# Altium PCB PCB3.PcbDoc (part 2 of 2)
Units mil, origin at the board's own origin, x right, y up, seen from the top; angles counter-clockwise.
Board outline 6000 x 4000 mil, 2 copper layers (Top Layer, Bottom Layer); 107 components, 78 nets, 393 pads, 135 vias.
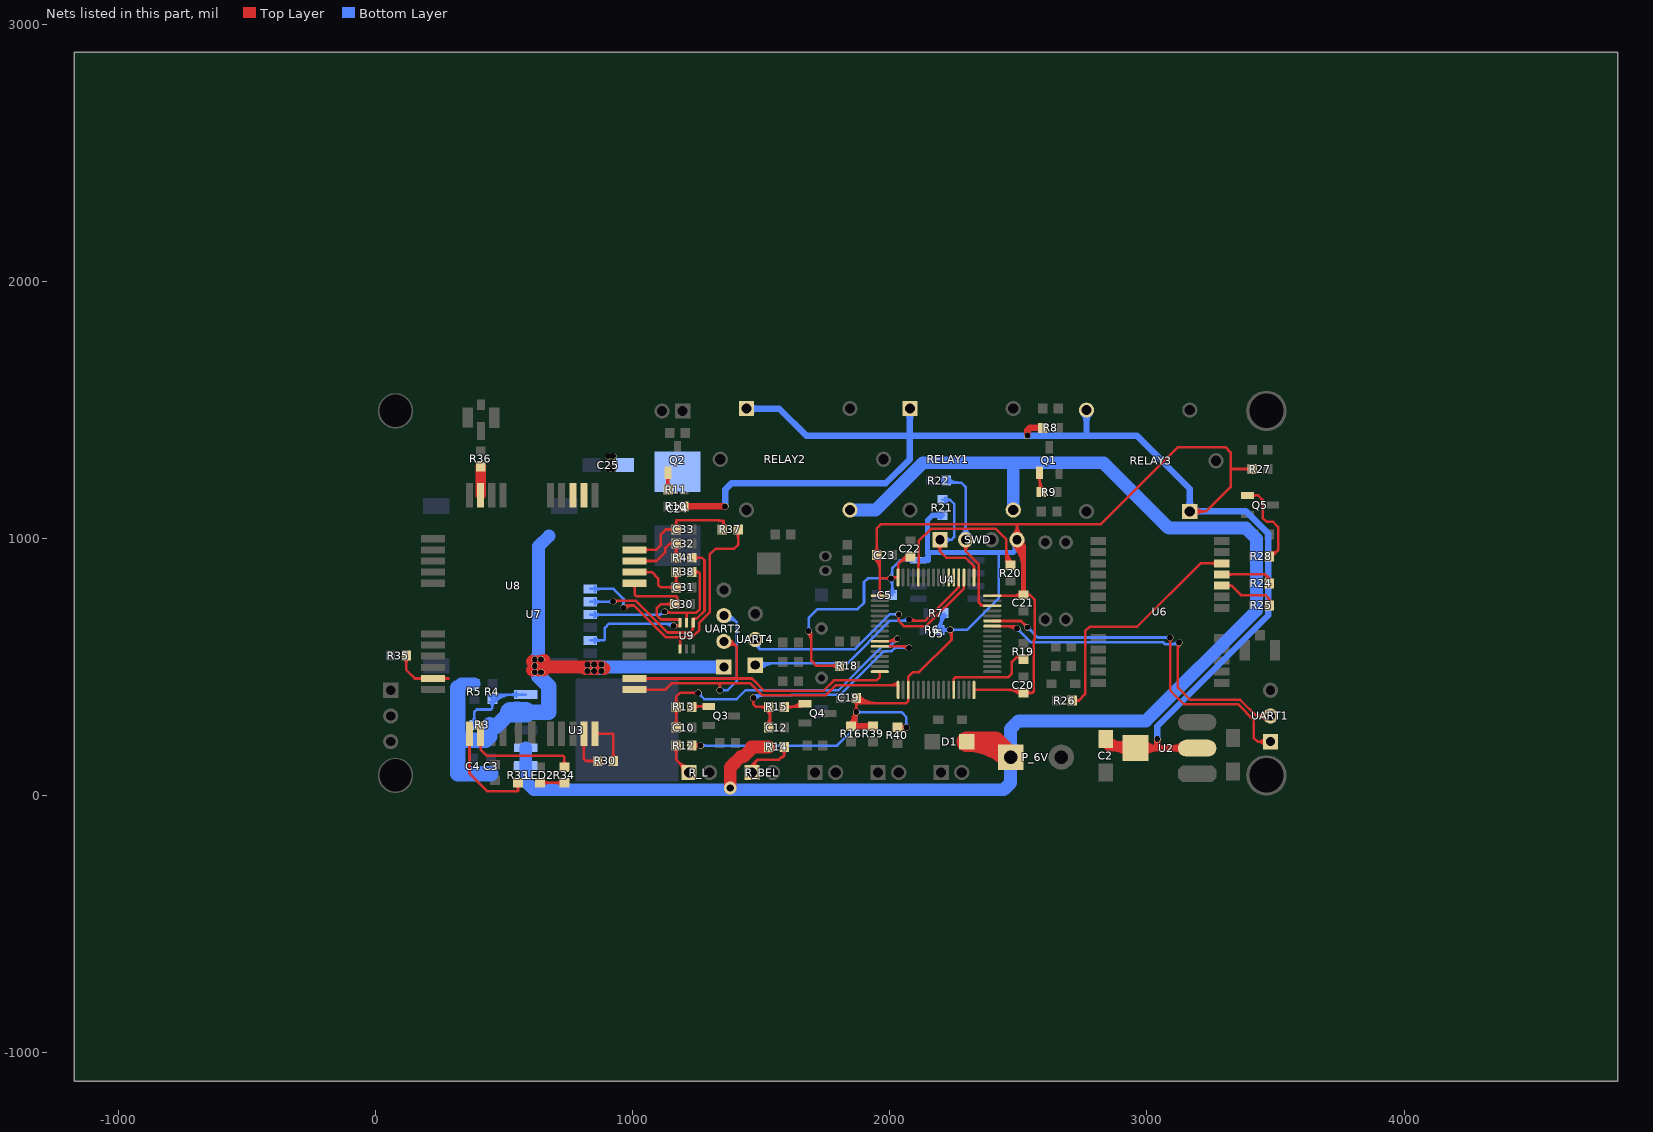
[diagram p2: the nets of this part, all layers, seen from the top]

## Via types
v1: diameter 25, hole 23, Top Layer to Bottom Layer, 134 vias
v2: diameter 50, hole 28, Top Layer to Bottom Layer, 1 vias

## Nets (pads, with @x,y where several pads share a name; then routed paths per layer and width w, separated by ;. In a path a pad name is that pad's centre, name@x,y a point inside that pad or via, vN(x,y) a via of type N, cw(c..) or ccw(c..) an arc to the next point about the centre after c; other vN are vias at no path point) (continued)
NetLED2_A: LED2.A R34.1 | length 210.6
  Top Layer w10: LED2.A@640,49.68 R34.1@735,49.69 R34.1@720.31,49.69 ; LED2.A@650.39,40.28 cw(c673.11,17.56) 673.11,49.68 cw(c673.11,81.81) LED2.A@650.39,59.09 ; R34.1@724.61,40.28 ccw(c701.89,17.56) 701.89,49.68 ccw(c701.89,81.81) R34.1@724.61,59.09
NetQ1_1: Q1.1 R9.2 | length 171.5
  Top Layer w10: Q1.1@2576.39,1238.75 cw(c2561.4,1223.76) 2582.6,1223.76 cw(c2603.79,1223.76) Q1.1@2588.81,1238.75 ; R9.2@2582.6,1187.09 Q1.1@2582.6,1255.79 ; 2582.6,1206.08 ccw(c2614.78,1206.08) R9.2@2592.02,1183.32 ; 2582.6,1230.22 ccw(c2638.92,1230.22) R9.2@2599.09,1190.39
NetQ2_1: Q2.1 R11.2 | length 189.7
  Top Layer w10: R11.2@1130.28,1200.39 ccw(c1118.87,1211.8) 1135,1211.8 ; Q2.1@1131.39,1238.75 cw(c1122.68,1230.04) 1135,1230.04 ; R11.2@1135,1185 Q2.1@1135,1250.79 ; 1135,1210.28 ccw(c1158.98,1210.28) R11.2@1142.02,1193.32 ; 1135,1217.49 cw(c1165.07,1217.49) Q2.1@1143.81,1238.75 ; Q2.1@1135,1234.42 ccw(c1183.12,1234.42) R11.2@1149.09,1200.39 ; 1139.1,1219.12 cw(c1159.52,1224.6) Q2.1@1144.03,1238.99
NetQ3_1: Q3.1 R13.2 | length 150.2
  Top Layer w10: R13.2@1230.32,345 1232.72,347.4 Q3.1@1295.79,347.4 ; R13.2@1239.72,336.57 cw(c1265.86,310.44) 1265.86,347.4 ; R13.2@1239.72,355.39 ccw(c1259.02,374.69) 1259.02,347.4 ; Q3.1@1278.75,341.19 ccw(c1263.76,326.21) 1263.76,347.4 ccw(c1263.76,368.6) Q3.1@1278.75,353.61
NetQ4_1: Q4.1 R15.2 | length 194.4
  Top Layer w10: R15.2@1595.31,345 Q4.1@1658.39,345 ; R15.2@1599.72,335.59 cw(c1622.44,312.87) 1622.44,345 cw(c1622.44,377.13) R15.2@1599.72,354.41 ; 1608.83,345 ccw(c1608.83,408.54) Q4.1@1653.75,363.61 ; 1632.97,345 ccw(c1632.97,384.39) Q4.1@1660.82,356.54
NetQ5_1: Q5.1 R28.2 | length 450
  Top Layer w10: Q5.1@3390.79,1167.4 3432.6,1167.4 3450,1150 3450,1080 3465,1065 3490,1065 3510,1045 3510,955 ; Q5.1@3407.82,1161.19 cw(c3422.81,1146.21) 3422.81,1167.4 cw(c3422.81,1188.6) Q5.1@3407.82,1173.61 ; R28.2@3460.32,935 3490,935 3510,955 ; R28.2@3475.8,934.26 ccw(c3479.22,957.62) 3495.92,940.92 ; R28.2@3477.25,944.15 ccw(c3482.83,982.17) 3510,955
NetR3_1: R3.1 R4.2 U3.5 | length 639.4
  Bottom Layer w10: R3.1@375.28,285.39 ccw(c352.56,308.11) 384.69,308.11 ccw(c416.81,308.11) R3.1@394.09,285.39 ; R3.1@384.69,275 384.69,324.69 395,335 450,335 455,340 R4.2@455,374.68 455,393 U3.5@585,393 ; R4.2@444.18,386.49 cw(c459.9,370.77) 459.9,393 ; R4.2@445.59,365.28 cw(c422.87,342.56) 455,342.56 cw(c487.13,342.56) R4.2@464.41,365.28 ; R4.2@451.25,379.42 cw(c484.04,346.63) 484.04,393 ; R4.2@458.32,372.35 cw(c508.18,322.48) 508.18,393 ; R4.2@465.39,365.28 cw(c532.33,298.34) 532.33,393 ; U3.5@548.51,384.51 ccw(c528.03,364.03) 528.03,393 ccw(c528.03,421.97) U3.5@548.51,401.49
NetR12_1: R12.1 R_L.1 | length 324.4
  Top Layer w10: R12.1@1160.28,184.61 cw(c1137.56,161.89) 1169.69,161.89 cw(c1201.81,161.89) R12.1@1179.09,184.61 ; R12.1@1169.69,195 1169.69,140.31 R_L.1@1220,90 ; R_L.1@1195.47,90 ccw(c1136.26,90) 1178.13,131.87 ccw(c1220,173.74) R_L.1@1220,114.53 ; R_L.1@1205.47,90 ccw(c1170.4,90) 1195.2,114.8 ccw(c1220,139.6) R_L.1@1220,104.53
NetR14_1: R14.1 R_BEL.1 | length 380.1
  Top Layer w10: R_BEL.1@1460.13,114.04 ccw(c1458.92,120) 1465,120 ; R_BEL.1@1465,90 1465,120 ; R_BEL.1@1468.44,92.94 cw(c1486.25,108.14) 1469.7,124.7 ; R_BEL.1@1469.87,114.04 cw(c1471.08,120) 1465,120 ; R_BEL.1@1476.05,99.43 cw(c1494.51,115.19) 1477.35,132.35 ; R_BEL.1@1483.66,105.92 cw(c1502.76,122.23) 1485,140 ; R14.1@1580.91,179.61 cw(c1558.19,156.89) 1590.31,156.89 cw(c1622.44,156.89) R14.1@1599.72,179.61 ; R14.1@1590.31,190 1590.31,155.84 1585,150.53 1580.07,150.53 1569.54,140 1485,140 ; 1465,120 1485,140
NetR19_2: R19.2 U5.28 | length 402.3
  Top Layer w10: U5.28@2248.9,411.5 2248.9,453.9 2255,460 2460,460 2475,475 2475,520 2494.68,539.68 ; R19.2@2505.72,529.11 ccw(c2494.69,528.64) 2494.69,539.68 ; R19.2@2530,539.68 2494.68,539.68
NetR20_1: R20.1 U5.60 | length 808.9
  Top Layer w10: U5.60@2111.1,848.5 2111.1,896.1 2112.29,897.29 2112.29,989.73 2160.09,1037.53 2412.62,1037.53 2452.47,997.67 2452.47,917.21 ; 2452.47,919.1 ccw(c2492.8,919.1) R20.1@2464.28,890.58 ; 2452.47,943.24 ccw(c2516.94,943.24) R20.1@2471.35,897.65 ; 2452.47,967.38 ccw(c2541.08,967.38) R20.1@2478.43,904.72 ; 2455.44,914.25 ccw(c2469.02,927.82) R20.1@2469.02,908.62 ; R20.1@2456.46,899.72 ccw(c2440.56,905.3) 2452.47,917.21 ; R20.1@2469.69,900 2452.47,917.21
NetR24_1: R24.1 U6.21 | length 322.8
  Top Layer w10: U6.21@3290.31,860.08 3459.92,860.08 ; U6.21@3312.17,852.48 cw(c3330.52,834.13) 3330.52,860.08 cw(c3330.52,886.03) U6.21@3312.17,867.68 ; R24.1@3463.71,832.5 ccw(c3443.63,843.79) 3459.92,860.08 ; 3469.25,850.75 cw(c3455.58,837.08) R24.1@3472.43,827.6 ; R24.1@3470.95,838.56 ccw(c3468.83,844.68) 3475.31,844.68 ; R24.1@3475.31,825 3475.31,844.69 ; R24.1@3479.68,838.56 cw(c3481.8,844.68) 3475.31,844.68 ; 3459.92,860.08 3475.31,844.69
NetR25_1: R25.1 U6.20 | length 296.1
  Top Layer w10: U6.20@3290.31,816.77 3328.23,816.77 ; U6.20@3312.66,809.7 cw(c3328.23,796.1) 3328.23,816.77 ; U6.20@3312.66,823.84 ccw(c3328.23,837.44) 3328.23,816.77 ; R25.1@3468.39,752.35 ccw(c3460.86,764.68) 3475.31,764.68 ; R25.1@3475.31,740 3475.31,764.69 ; R25.1@3482.24,752.35 cw(c3489.77,764.68) 3475.31,764.68 ; 3328.23,816.77 3365,780 3460,780 3475.31,764.69
NetR26_1: R26.1 U6.22 | length 1017.1
  Top Layer w10: R26.1@2710.31,370 2735,370 ; R26.1@2721.43,362.69 cw(c2735,353.76) 2735,370 ; R26.1@2721.43,377.31 ccw(c2735,386.24) 2735,370 ; U6.22@3268.46,895.79 ccw(c3250.11,877.44) 3250.11,903.39 ccw(c3250.11,929.33) U6.22@3268.46,910.99 ; U6.22@3290.31,903.39 3208.39,903.39 2962.27,657.27 2777.73,657.27 2760,639.54 2760,395 2735,370
NetR30_1: R30.1 U7.19 | length 238.2
  Top Layer w10: U7.19@805.05,201.51 cw(c790.06,186.52) 811.26,186.52 cw(c832.46,186.52) U7.19@817.47,201.51 ; U7.19@811.26,241.18 811.26,143.74 820,135 R30.1@864.69,135 ; R30.1@855.28,125.59 ccw(c832.56,102.87) 832.56,135 ccw(c832.56,167.13) R30.1@855.28,144.41
NetR30_2: R30.2 U7.20 | length 259.8
  Top Layer w10: U7.20@854.57,241.18 923.82,241.18 925.32,239.68 R30.2@925.32,135 ; U7.20@860.77,234.97 cw(c875.76,219.99) 875.76,241.18 cw(c875.76,262.38) U7.20@860.77,247.39 ; R30.2@915.91,145.39 ccw(c893.19,168.11) 925.32,168.11 ccw(c957.44,168.11) R30.2@934.72,145.39
NetR33_2: R33.2 U7.12 | length 480
  Top Layer w10: U7.12@360.17,201.51 cw(c345.18,186.52) 366.38,186.52 cw(c387.57,186.52) U7.12@372.59,201.51 ; U7.12@366.38,241.18 366.38,86.62 435,18 553,18 555,20 ; R33.2@546.15,39.75 cw(c528.55,20) 555,20 ; R33.2@555,49.68 555,20 ; R33.2@563.85,39.75 ccw(c581.45,20) 555,20
NetR34_2: R34.2 U7.13 | length 522.2
  Top Layer w10: U7.13@403.48,201.51 cw(c388.49,186.52) 409.68,186.52 cw(c430.88,186.52) U7.13@415.89,201.51 ; U7.13@409.68,241.18 409.68,180.32 435,155 730,155 735,150 R34.2@735,110.32 ; R34.2@725.59,119.72 ccw(c702.87,142.44) 735,142.44 ccw(c767.13,142.44) R34.2@744.41,119.72
NetR35_1: R35.1 U7.10 | length 350.8
  Top Layer w10: R35.1@110.91,534.61 cw(c88.19,511.89) 120.31,511.89 cw(c152.44,511.89) R35.1@129.72,534.61 ; R35.1@120.31,545 120.31,489.69 154.25,455.75 U7.10@224.65,455.75 284.65,455.75 ; U7.10@184.97,449.54 ccw(c169.99,434.55) 169.99,455.75 ccw(c169.99,476.94) U7.10@184.97,461.96 ; U7.10@264.32,449.54 cw(c279.31,434.55) 279.31,455.75 cw(c279.31,476.94) U7.10@264.32,461.96
NetR36_1: R36.1 U7.39 | length 110.7
  Top Layer w40: U7.39@410,1168.66 R36.1@410,1279.37
RING_BELL: C12.2 R15.1 U5.11 | length 1303.9
  Top Layer w10: v1@1464.7,374.7 cw(c1451.89,361.89) 1470,361.89 cw(c1488.11,361.89) v1@1475.3,374.7 ; v1(1470,380) 1470,355 1480,345 1534.68,345 C12.2@1534.68,265 ; C12.2@1520.28,275.39 ccw(c1485.49,310.18) 1534.68,310.18 ; R15.1@1520.28,334.61 cw(c1485.49,299.82) 1534.68,299.82 ; R15.1@1520.28,335.59 ccw(c1497.56,312.87) 1497.56,345 ccw(c1497.56,377.13) R15.1@1520.28,354.41 ; C12.2@1527.35,268.32 ccw(c1509.63,286.04) 1534.68,286.04 ccw(c1549.74,286.04) C12.2@1539.09,275.39 ; R15.1@1527.35,341.68 cw(c1509.63,323.96) 1534.68,323.96 cw(c1549.74,323.96) R15.1@1539.09,334.61 ; U5.11@1961.5,580.79 2064.21,580.79 v1@2065,580 ; 2042.92,580.79 cw(c2042.92,542.92) v1@2069.7,569.7
  Bottom Layer w10: v1@1468.23,381.77 cw(c1488.11,361.89) 1488.11,390 ; v1(1470,380) 1480,390 1618,390 1620,392 1807.46,392 1977.46,562 2007.46,562 2020.46,575 v1(2075,575) ; v1@1475.3,374.7 cw(c1512.25,337.75) 1512.25,390 ; v1@2069.7,569.7 ccw(c2056.89,556.89) 2056.89,575 ccw(c2056.89,593.11) v1@2069.7,580.3
RING_LED: C10.2 R13.1 U5.10 | length 1455
  Top Layer w10: C10.2@1160.28,275.39 ccw(c1137.56,298.11) 1169.69,298.11 ccw(c1201.81,298.11) C10.2@1179.09,275.39 ; R13.1@1160.28,334.61 cw(c1137.56,311.89) 1169.69,311.89 cw(c1201.81,311.89) R13.1@1179.09,334.61 ; R13.1@1160.28,355.39 ccw(c1137.56,378.11) 1169.69,378.11 ccw(c1201.81,378.11) R13.1@1179.09,355.39 ; C10.2@1169.68,265 R13.1@1169.69,345 1169.69,384.69 1185,400 v1(1255,400) ; v1@1249.7,394.7 ccw(c1236.89,381.89) 1236.89,400 ccw(c1236.89,418.11) v1@1249.7,405.3 ; U5.10@1961.5,600.47 2024.53,600.47 v1@2025,600 ; U5.10@1988.89,600.47 ccw(c1988.89,651.11) v1@2024.7,615.3 ; 2013.03,600.47 ccw(c2013.03,626.97) v1@2031.77,608.23
  Bottom Layer w10: v1@1255,392.5 cw(c1255,374.39) 1267.8,387.2 cw(c1280.61,400) v1@1262.5,400 ; v1(1255,400) 1280,375 1405,375 1440,410 1800,410 1970,580 2000,580 v1(2030,610) ; v1@2022.5,610 cw(c2004.39,610) 2017.2,597.2 cw(c2030,584.39) v1@2030,602.5
RXD1: U5.43 UART1.1 | length 1663.1
  Top Layer w10: U5.43@2398.5,679.21 2510.79,679.21 v1(2535,655) ; v1@2527.5,655 ccw(c2509.39,655) 2522.2,667.8 ccw(c2535,680.61) v1@2535,662.5 ; v1@3084.7,609.7 cw(c3071.89,596.89) 3090,596.89 cw(c3108.11,596.89) v1@3095.3,609.7 ; v1(3090,615) 3090,410 3145,355 3355,355 3415,295 3415,225 3430,210 ; UART1.1@3460.6,194.99 ccw(c3430,171.31) 3430,210 ; UART1.1@3460.6,225.01 cw(c3430,248.69) 3430,210 ; UART1.1@3468.51,201.11 ccw(c3450.39,187.08) 3450.39,210 ccw(c3450.39,232.92) UART1.1@3468.51,218.89 ; UART1.1@3480,210 3430,210
  Bottom Layer w10: v1@2535,647.5 cw(c2535,629.39) 2547.8,642.2 cw(c2560.61,655) v1@2542.5,655 ; v1(2535,655) 2575,615 v1(3090,615) ; v1@3084.7,609.7 ccw(c3071.89,596.89) 3071.89,615 ccw(c3071.89,633.11) v1@3084.7,620.3
RXD4: U5.52 UART4.1 | length 1207.1
  Top Layer w10: v1(2075,685) 2080,680 2136.49,680 2268.58,812.09 U5.52@2268.58,848.5 ; v1@2080.3,690.3 ccw(c2105.18,715.18) 2105.18,680 ; 2263.12,806.62 ccw(c2251.16,818.58) U5.52@2268.07,818.58
  Bottom Layer w10: UART4.1@1470,500 1484.77,514.77 1835.23,514.77 1999.96,679.5 2069.5,679.5 v1(2075,685) ; UART4.1@1480.59,504.18 cw(c1506.15,478.62) UART4.1@1506.15,514.77 ; UART4.1@1487.66,497.11 cw(c1530.29,454.48) 1530.29,514.77 ; UART4.1@1494.73,490.04 cw(c1554.43,430.34) 1554.43,514.77 ; UART4.1@1494.73,524.73 ccw(c1518.77,548.77) 1518.77,514.77 ; 2043.62,679.5 ccw(c2043.62,716.38) v1@2069.7,690.3
RXD5: U5.54
SIM_CLK: C33.2 R37.2 U7.30 | length 662.1
  Top Layer w10: U7.30@975,960 U7.30@980,955 ; U7.30@1008.11,955.75 1090.75,955.75 1110,975 1110,1015 1130,1035 C33.2@1169.68,1035 ; U7.30@1047.78,949.54 cw(c1062.77,934.55) 1062.77,955.75 cw(c1062.77,976.94) U7.30@1047.78,961.96 ; C33.2@1160.28,1025.59 ccw(c1137.56,1002.87) 1137.56,1035 ccw(c1137.56,1067.13) C33.2@1160.28,1044.41 ; C33.2@1160.28,1045.39 ccw(c1137.56,1068.11) 1169.68,1068.11 ccw(c1201.81,1068.11) C33.2@1179.09,1045.39 ; C33.2@1174.68,1030 1169.68,1030 C33.2@1169.68,1035 ; 1335,1070 1169.68,1070 C33.2@1169.68,1035 ; 1335.32,1069.68 1354.68,1069.68 ; R37.2@1342.44,1047.15 ccw(c1327.82,1069.68) 1354.68,1069.68 ; R37.2@1354.68,1035 1354.68,1069.68 ; 1354.68,1056.04 ccw(c1369.74,1056.04) R37.2@1359.09,1045.39
SIM_CLK0: R37.1 U8.6 U9.1 | length 1277.5
  Top Layer w10: v1@963.16,731.7 cw(c982.14,714.16) 982.14,740 ; v1(965,730) 975,740 ; v1@966.42,737.37 ccw(c968.22,746.78) 975,740 ; v1@970.51,724.91 cw(c1005,693.04) 1005,740 ; v1@972.37,731.42 cw(c981.78,733.22) 975,740 ; U9.1@1185,580 1185,615 ; R37.1@1400.91,1024.61 cw(c1378.19,1001.89) 1410.31,1001.89 cw(c1442.44,1001.89) R37.1@1419.72,1024.61 ; R37.1@1410.31,1035 1410.31,975.31 1395,960 1323,960 1300,937 1300,712.79 1260,672.79 1260,645 1231.5,616.5 1128.5,616.5 1005,740 ; 975,740 1005,740
  Bottom Layer w10: U8.6@836,803.82 926.18,803.82 965,765 v1(965,730) ; U8.6@853.65,794.83 cw(c875.36,773.12) 875.36,803.82 cw(c875.36,834.52) U8.6@853.65,812.81 ; v1@959.7,735.3 ccw(c946.89,748.11) 965,748.11 ccw(c983.11,748.11) v1@970.3,735.3
SIM_DATA: C32.2 R41.2 U7.29 | length 422.1
  Top Layer w10: U7.29@1008.11,912.44 1092.44,912.44 1128,948 1128,963 1145,980 ; U7.29@1047.78,906.23 cw(c1062.77,891.25) 1062.77,912.44 cw(c1062.77,933.64) U7.29@1047.78,918.65 ; C32.2@1158.57,972.69 ccw(c1145,963.76) 1145,980 ; C32.2@1158.57,987.31 cw(c1145,996.24) 1145,980 ; R41.2@1160.28,935.39 ccw(c1137.56,958.11) 1169.68,958.11 ccw(c1201.81,958.11) R41.2@1179.09,935.39 ; C32.2@1160.28,969.61 cw(c1137.56,946.89) 1169.68,946.89 cw(c1201.81,946.89) C32.2@1179.09,969.61 ; R41.2@1169.68,912.44 R41.2@1172.13,912.44 ; R41.2@1169.68,925 C32.2@1169.68,980 1145,980
SIM_DATA0: R41.1 U8.5 U9.4 | length 981.2
  Top Layer w10: v1(925,755) 928,758 1012.46,758 1135.96,634.5 1224.04,634.5 1235,645.46 U9.4@1235,681.18 ; v1@930.3,749.7 cw(c950.35,729.65) 950.35,758 ; R41.1@1230.31,925 1270,925 1280,915 1280,718.25 1251.75,690 ; U9.4@1236.18,672.36 1236.18,688.68 1237.5,690 1251.75,690 ; U9.4@1236.84,683.55 cw(c1251.75,669.53) 1251.75,690 ; R41.1@1239.72,915.59 cw(c1262.44,892.87) 1262.44,925 cw(c1262.44,957.13) R41.1@1239.72,934.41
  Bottom Layer w10: U8.5@836,753.82 923.82,753.82 v1(925,755) ; U8.5@853.65,744.83 cw(c875.36,723.12) 875.36,753.82 cw(c875.36,784.52) U8.5@853.65,762.81 ; 904.04,753.82 ccw(c904.04,775.96) v1@919.7,760.3 ; 909.74,753.82 cw(c909.74,739.74) v1@919.7,749.7
SIM_RST: C31.2 R38.2 U7.28 | length 445.4
  Top Layer w10: U7.28@1008.11,869.13 1075.87,869.13 1100,845 1100,820 1110,810 C31.2@1169.68,810 R38.2@1169.68,870 ; U7.28@1047.78,862.93 cw(c1062.77,847.94) 1062.77,869.13 cw(c1062.77,890.33) U7.28@1047.78,875.34 ; C31.2@1160.28,800.59 ccw(c1137.56,777.87) 1137.56,810 ccw(c1137.56,842.13) C31.2@1160.28,819.41 ; C31.2@1160.28,820.39 ccw(c1137.56,843.11) 1169.68,843.11 ccw(c1201.81,843.11) C31.2@1179.09,820.39 ; R38.2@1160.28,859.61 cw(c1137.56,836.89) 1169.68,836.89 cw(c1201.81,836.89) R38.2@1179.09,859.61
SIM_RST0: R38.1 U8.4 U9.5 | length 777.5
  Top Layer w10: v1@1117.94,715 v1(1125,715) ; v1@1125,710.5 1246.8,710.5 1262,725.7 1262,863 1255,870 ; v1@1130.3,720.3 ccw(c1153.97,743.97) 1153.97,710.5 ; U9.5@1210.59,672.36 1210.54,672.41 1210.54,709.86 1210.59,709.91 ; R38.1@1230.31,870 1255,870 ; R38.1@1241.43,862.69 cw(c1255,853.76) 1255,870 ; R38.1@1241.43,877.31 ccw(c1255,886.24) 1255,870
  Bottom Layer w10: U8.4@836,703.82 1106.76,703.82 ; U8.4@853.65,694.83 cw(c875.36,673.12) 875.36,703.82 cw(c875.36,734.52) U8.4@853.65,712.81 ; v1@1122.81,707.83 ccw(c1118.12,692.46) 1106.76,703.82 ; v1(1125,715) 1117.94,715 1106.76,703.82
SIM_RXD2: U5.17 U7.21 UART2.3 | length 1721.5
  Top Layer w10: U7.21@1008.11,412.44 1127.44,412.44 1152.75,437.75 1340,437.75 ; U7.21@1047.78,406.23 cw(c1062.77,391.25) 1062.77,412.44 cw(c1062.77,433.64) U7.21@1047.78,418.65 ; v1@1334.7,415.3 ccw(c1321.89,428.11) 1340,428.11 ccw(c1358.11,428.11) v1@1345.3,415.3 ; v1(1340,410) 1340,437.75 ; 2003.56,430 ccw(c2003.56,470.22) U5.17@2032,441.78 ; U5.17@2032.36,411.5 2032.36,427.64 2030,430 1790.46,430 1750.46,390 1504.54,390 1456.8,437.75 1340,437.75
  Bottom Layer w10: v1(1340,410) 1370,410 1405,445 1405,675 ; v1@1345.3,404.7 cw(c1358.11,391.89) 1358.11,410 cw(c1358.11,428.11) v1@1345.3,415.3 ; UART2.3@1350,700 UART2.3@1355,700 1380,700 1405,675 ; UART2.3@1357.4,696.16 cw(c1370.18,675.73) 1387.23,692.77 ; UART2.3@1362.7,687.68 cw(c1377.02,664.8) 1396.11,683.89 ; UART2.3@1368.01,679.21 cw(c1383.86,653.86) 1405,675
SIM_TXD2: U5.16 U7.22 UART2.2 | length 1377.3
  Top Layer w10: U7.22@1008.11,455.75 1405,455.75 ; U7.22@1047.78,449.54 cw(c1062.77,434.55) 1062.77,455.75 cw(c1062.77,476.94) U7.22@1047.78,461.96 ; UART2.2@1335,600 1350,600 1385,600 ; UART2.2@1357.94,596.56 cw(c1373.14,578.75) 1389.7,595.3 ; UART2.2@1364.43,588.95 cw(c1380.19,570.49) 1397.35,587.65 ; UART2.2@1370.92,581.34 cw(c1387.23,562.24) 1405,580 ; UART2.2@1379.04,595.13 cw(c1385,593.92) 1385,600 ; UART2.2@1379.04,604.87 ccw(c1385,606.08) 1385,600 ; U5.16@1961.5,482.36 1961.5,461.5 1948,448 1783,448 1743,408 1512,408 1464.25,455.75 1405,455.75 ; 1385,600 1405,580 ; 1405,455.75 1405,580
SIM_VCC: C30.2 U7.27 U8.2 U9.6 | length 1101.8
  Top Layer w10: U7.27@1001.9,819.62 cw(c986.91,804.63) 1008.11,804.63 cw(c1029.31,804.63) U7.27@1014.32,819.62 ; U7.27@1008.11,825.83 1008.11,781.89 1014,776 1169,776 1174.68,770.32 ; C30.2@1155.28,735.59 ccw(c1132.56,712.87) 1132.56,745 ccw(c1132.56,777.13) C30.2@1155.28,754.41 ; v1(1160,660) 1185,660 U9.6@1185,672.36 1185,685 1110.91,685 1095,700.91 1095,730 1110,745 C30.2@1169.68,745 ; C30.2@1164.11,759.28 ccw(c1163.64,770.31) 1174.68,770.31 ; v1@1165.3,654.7 cw(c1178.11,641.89) 1178.11,660 cw(c1178.11,678.11) v1@1165.3,665.3 ; C30.2@1174.68,755 1174.68,770.32
  Bottom Layer w10: U8.2@836,603.82 888.82,603.82 892.5,607.5 892.5,652.5 908.75,668.75 1151.25,668.75 v1(1160,660) ; U8.2@853.65,594.83 cw(c875.36,573.12) 875.36,603.82 cw(c875.36,634.52) U8.2@853.65,612.81 ; 1120.77,668.75 cw(c1120.77,620.77) v1@1154.7,654.7 ; 1144.91,668.75 cw(c1144.91,644.91) v1@1161.77,661.77
SWCLK: R21.1 SWD.1 U5.49 | length 643.9
  Top Layer w10: SWD.1@2181.71,974.39 cw(c2165.99,950) 2195,950 ; SWD.1@2195,995 2195,950 ; SWD.1@2208.29,974.39 ccw(c2224.01,950) 2195,950 ; U5.49@2327.64,848.5 2327.64,892.36 2295,925 2220,925 2195,950
  Bottom Layer w10: SWD.1@2195,995 2240,995 ; R21.1@2205,1150.31 2234.69,1150.31 ; SWD.1@2215.61,981.71 cw(c2240,965.99) 2240,995 ; SWD.1@2215.61,1008.29 ccw(c2240,1024.01) 2240,995 ; R21.1@2216.14,1141.72 cw(c2234.68,1126.02) 2234.68,1150.31 ; R21.1@2216.14,1158.91 ccw(c2234.68,1174.61) 2234.68,1150.31 ; 2234.69,1150.31 2250,1135 2250,1005 2240,995
SWDIO: R22.2 SWD.2 U5.46 | length 930.5
  Top Layer w10: SWD.2@2281.89,974.27 cw(c2266.82,950.46) 2295,950.46 ; SWD.2@2295,995 2295,950.46 ; SWD.2@2308.11,974.27 ccw(c2323.18,950.46) 2295,950.46 ; 2351.4,745.9 ccw(c2368.58,763.07) U5.46@2368.58,738.78 ; U5.46@2398.5,738.27 2359.03,738.27 2346.15,751.15 2346.15,899.31 2295,950.46
  Bottom Layer w10: R22.2@2205,1229.68 2205,1217 2278,1217 2295,1200 SWD.2@2295,995 ; R22.2@2222.65,1226.35 ccw(c2245.24,1248.94) 2245.24,1217 ; R22.2@2229.72,1233.43 ccw(c2269.38,1273.08) 2269.38,1217 ; SWD.2@2277.66,1012.34 ccw(c2235.79,1054.21) 2295,1054.21 ccw(c2354.21,1054.21) SWD.2@2312.34,1012.34 ; SWD.2@2284.73,1005.27 ccw(c2259.93,1030.07) 2295,1030.07 ccw(c2330.07,1030.07) SWD.2@2305.27,1005.27
TXD1: U5.42 UART1.2 | length 1611.4
  Top Layer w10: U5.42@2398.5,659.53 2489.53,659.53 2495,654.05 v1(2495,650) ; 2453.89,659.53 cw(c2453.89,608.89) v1@2489.7,644.7 ; 2478.03,659.53 cw(c2478.03,633.03) v1@2496.77,651.77 ; 3120,564.82 cw(c3155.18,564.82) v1@3130.3,589.7 ; v1(3125,595) 3120,590 3120,420 3167,373 3362.46,373 3425.46,310 ; UART1.2@3461.65,293.72 ccw(c3425.46,261.62) 3425.46,310 ; UART1.2@3461.65,326.28 cw(c3425.46,358.38) 3425.46,310 ; UART1.2@3469.13,300.36 ccw(c3447.7,281.35) 3447.7,310 ccw(c3447.7,338.65) UART1.2@3469.13,319.64 ; UART1.2@3480,310 3425.46,310
  Bottom Layer w10: v1@2495,642.5 cw(c2495,624.39) 2507.8,637.2 cw(c2520.61,650) v1@2502.5,650 ; v1(2495,650) 2548,597 3061.44,597 3069.22,589.22 v1@3119.22,589.22 ; 3092.94,589.22 ccw(c3092.94,627.06) v1@3119.7,600.3
TXD4: U5.51 UART4.2 | length 1143.8
  Top Layer w10: v1@2029.7,699.7 cw(c2016.89,686.89) 2035,686.89 cw(c2053.11,686.89) v1@2040.3,699.7 ; v1(2035,705) 2035,680 2055.5,659.5 2141.45,659.5 2288.27,806.32 U5.51@2288.27,848.5
  Bottom Layer w10: UART4.2@1455,610 1495,570 ; UART4.2@1487.76,597.22 ccw(c1497.94,587.23) 1487.86,577.14 ; UART4.2@1494.9,590.21 ccw(c1505.16,580.16) 1495,570 ; v1@2029.7,699.7 ccw(c2016.89,686.89) 2016.89,705 ccw(c2016.89,723.11) v1@2029.7,710.3 ; v1(2035,705) 2000,705 1865,570 1495,570
TXD5: U5.53
VCC: C2.1 C5.1 C19.2 C20.2 C21.1 C22.2 C23.2 R6.2 R7.2 R8.2 R10.2 R12.2 R16.2 R18.1 R21.2 R27.2 R39.2 R40.2 RELAY1.1 RELAY2.1 RELAY3.1 RELAY3.4 SWD.4 U2.2 U2.4 U4.8 U5.1 U5.19 U5.32 U5.48 U5.64 | length 16176.7
  Top Layer w10: R12.2@1230.32,195 v1(1265,195) ; R12.2@1239.72,185.59 cw(c1262.44,162.87) 1262.44,195 cw(c1262.44,227.13) R12.2@1239.72,204.41 ; R12.2@1247.49,190.99 cw(c1251.71,175.22) v1@1260.82,188.77 ; R12.2@1247.49,199.01 ccw(c1251.71,214.78) v1@1260.82,201.23 ; 1248.88,191.37 ccw(c1244.78,206.67) v1@1258.5,198.75 ; 1248.88,198.63 cw(c1244.78,183.33) v1@1258.5,191.25 ; v1@1259.7,189.7 ccw(c1246.89,176.89) 1246.89,195 ccw(c1246.89,213.11) v1@1259.7,200.3 ; v1@1679.7,634.7 cw(c1642.75,597.75) 1695,597.75 ; v1(1685,640) 1695,630 ; v1@1686.42,632.63 cw(c1688.22,623.22) 1695,630 ; v1@1686.77,641.77 cw(c1666.89,621.89) 1695,621.89 ; v1@1692.37,638.58 ccw(c1701.78,636.78) 1695,630 ; R18.1@1795.28,495.59 ccw(c1772.56,472.87) 1772.56,505 ccw(c1772.56,537.13) R18.1@1795.28,514.41 ; R18.1@1804.69,505 1715,505 1695,525 1695,630 ; R16.2@1841.57,279.72 ccw(c1772.19,349.11) 1870.32,349.11 ; R16.2@1848.65,272.65 ccw(c1796.33,324.97) v1@1870.31,324.97 ; R16.2@1855.72,265.58 ccw(c1820.47,300.83) 1870.31,300.83 ; 1857.11,304.87 cw(c1880.4,293.01) v1@1872.32,317.87 ; C19.2@1858.51,367.21 ccw(c1875.92,384.62) 1875.92,360 ; C19.2@1860.91,369.61 cw(c1838.19,346.89) 1870.32,346.89 cw(c1902.44,346.89) C19.2@1879.72,369.61 ; 1862.26,314.99 ccw(c1853.28,319.56) v1@1862.87,322.68 ; R16.2@1862.79,258.51 ccw(c1844.62,276.68) 1870.32,276.68 ; v1@1863.5,321.25 cw(c1846.9,311.66) 1865.42,306.7 ; v1@1864.7,319.7 cw(c1851.13,306.13) 1870.32,306.13 ; v1@1864.7,330.3 ccw(c1851.13,343.87) 1870.32,343.87 ; C19.2@1865.57,366.59 cw(c1862.93,359.69) 1870.32,359.69 ; C19.2@1865.58,374.28 ccw(c1900.07,408.77) 1900.07,360 ; 1865.81,308.16 cw(c1882.27,303.75) v1@1873.75,318.5 ; 1869,338.64 ccw(c1875.36,337.84) v1@1872.89,331.92 ; 1870.32,275.63 1870.32,359.68 ; 1870.32,307.65 cw(c1887.35,307.65) v1@1875.3,319.7 ; 1870.32,342.35 ccw(c1887.35,342.35) v1@1875.3,330.3 ; C19.2@1870.32,369.68 C19.2@1870.32,380 C19.2@1870.32,385 ; C19.2@1872.65,381.35 ccw(c1924.21,432.91) 1924.21,360 ; C19.2@1875.06,366.59 ccw(c1877.7,359.69) 1870.32,359.69 ; C19.2@1879.72,388.43 ccw(c1948.35,457.05) 1948.35,360 ; C23.2@1940.28,924.61 cw(c1889.04,873.38) 1961.5,873.38 ; C23.2@1940.28,945.39 ccw(c1917.56,968.11) 1949.68,968.11 ccw(c1981.81,968.11) C23.2@1959.09,945.39 ; C23.2@1947.35,931.68 cw(c1913.19,897.52) 1961.5,897.52 ; C23.2@1949.69,935 1949.69,1039.68 1965.53,1055.53 2495,1055.53 ; U5.1@1961.5,777.64 1961.5,845 ; C23.2@1961.5,923.19 1961.5,845 ; v1@1999.7,839.7 ccw(c1986.89,826.89) 1986.89,845 ccw(c1986.89,863.11) v1@1999.7,850.3 ; v1(2005,845) 1961.5,845 ; v1@2008.5,848.5 U5.64@2032.36,848.5 2032.36,901.06 ; v1@2010.3,839.7 cw(c2031.57,818.43) U5.64@2031.57,848.5 ; R40.2@2030,265.32 2064.68,265.32 v1(2065,265) ; R40.2@2040.39,255.91 cw(c2063.11,233.19) 2063.11,265.32 cw(c2063.11,297.44) R40.2@2040.39,274.72 ; R40.2@2046.13,265.32 cw(c2046.13,246.13) v1@2059.7,259.7 ; 2046.81,915.51 cw(c2073.83,888.48) C22.2@2078.6,926.4 ; R40.2@2047.36,269.54 ccw(c2052,286.86) v1@2061.17,271.45 ; R40.2@2047.65,265.32 ccw(c2047.65,282.35) v1@2059.7,270.3 ; R40.2@2047.89,269.39 cw(c2043.37,252.51) v1@2058.5,261.25 ; R40.2@2048.38,261.37 cw(c2052.02,247.78) v1@2060.48,259.01 ; R40.2@2049.16,261.58 ccw(c2045.17,276.45) v1@2058.5,268.75 ; C22.2@2077.35,916.48 ccw(c2070.6,862.83) 2032.36,901.07 ; C22.2@2080,929.68 2060.98,929.68 2032.36,901.06 ; v1@2229.7,639.7 cw(c2204.82,614.82) 2240,614.82 ; v1(2235,645) 2240,645 2240,605.91 2114.09,480 2090,480 2071.73,461.73 U5.19@2071.73,411.5 2071.73,366.73 2065,360 1870,360 1870.32,359.68 ; U5.32@2327.64,411.5 C20.2@2508.19,411.5 ; U5.48@2398.5,777.64 C21.1@2517.32,777.64 ; 2458.38,411.5 cw(c2458.38,339.04) C20.2@2509.61,390.28 ; SWD.4@2477.66,1012.34 ccw(c2435.79,1054.21) 2495,1054.21 ccw(c2554.21,1054.21) SWD.4@2512.34,1012.34 ; 2480.43,777.64 ccw(c2480.43,818.9) C21.1@2509.61,789.72 ; 2482.52,411.5 cw(c2482.52,363.19) C20.2@2516.68,397.35 ; SWD.4@2484.73,1005.27 ccw(c2459.93,1030.07) 2495,1030.07 ccw(c2530.07,1030.07) SWD.4@2505.27,1005.27 ; 2493.35,777.64 cw(c2493.35,754.65) C21.1@2509.61,770.91 ; SWD.4@2495,995 2495,1055.53 ; C20.2@2520,399.68 2554.19,399.68 2559.5,405 2559.5,602.47 2564.44,607.41 2564.44,760.87 2545,780.32 ; C21.1@2520,780.32 2545,780.32 ; C20.2@2530.39,390.28 cw(c2553.11,367.56) 2553.11,399.68 cw(c2553.11,431.81) C20.2@2530.39,409.09 ; C21.1@2532.27,773.26 cw(c2545,765.3) 2545,780.32 ; C21.1@2532.27,787.37 ccw(c2545,795.33) 2545,780.32 ; 2870.57,1105.28 2875.29,1110 ; RELAY3.1@3166.46,1105.28 3230.28,1105.28 3325,1200 3325,1267.5 ; RELAY3.1@3176.73,1095 cw(c3201.53,1070.2) 3201.53,1105.28 cw(c3201.53,1140.35) RELAY3.1@3176.73,1115.55 ; RELAY3.1@3183.8,1087.93 cw(c3225.67,1046.06) 3225.67,1105.28 cw(c3225.67,1164.49) RELAY3.1@3183.8,1122.62 ; R27.2@3400.28,1260.59 ccw(c3377.56,1237.87) 3377.56,1270 ccw(c3377.56,1302.13) R27.2@3400.28,1279.41 ; R27.2@3409.68,1270 3327.5,1270 3325,1267.5 ; 2495,1055.53 2820.53,1055.53 2875,1110 2875.29,1110 ; 2875.29,1110 3120.29,1355 3305,1355 3325,1335 3325,1267.5
  Top Layer w20: SWD.4@2481.19,981.19 cw(c2387.5,887.5) 2520,887.5 ; SWD.4@2495,995 2520,970 ; SWD.4@2495.33,995.33 cw(c2435.79,935.79) 2520,935.79 ; SWD.4@2499.34,975.96 cw(c2504.27,954.28) 2520,970 ; SWD.4@2514.04,990.66 ccw(c2535.72,985.73) 2520,970 ; C21.1@2514.13,786.19 ccw(c2499.94,800.37) 2520,800.37 ccw(c2540.06,800.37) C21.1@2525.87,786.19 ; C21.1@2520,780.32 2520,970
  Top Layer w25: R10.2@1200.32,1125 v1(1360,1125) ; R16.2@1850,270.32 R39.2@1935,270.32 ; R8.2@2594.68,1430 2545,1430 ; C2.1@2832.93,205.43 ccw(c2882.17,254.67) 2882.17,185.03 ; C2.1@2840,230 C2.1@2840,220 2840,195 2849.97,185.03 U2.4@2955.06,185.03 3040,185.03 ; C2.1@2850.61,223.11 ccw(c2942.53,315.03) U2.4@2942.53,185.03 ; U2.4@2921.13,169.07 ccw(c2867.67,143.93) 2882.96,200.99 ccw(c2895.82,248.96) U2.4@2929.57,212.54 ; U2.4@2928.55,158.52 ccw(c2864.53,94.5) 2864.53,185.03 ccw(c2864.53,275.57) U2.4@2928.55,211.55 ; U2.4@2982.78,159.77 cw(c3039.99,107.6) 3039.99,185.03 ; U2.4@2982.78,210.3 ccw(c3039.99,262.46) 3039.99,185.03 ; v1(3040,220) 3040,185.03 ; U2.2@3138.42,170.89 ccw(c3104.28,136.75) 3104.28,185.03 ccw(c3104.28,233.32) U2.2@3138.42,199.17 ; U2.2@3195.06,185.03 3040,185.03 ; 2545,1430 ccw(c2570,1405) v1(2535,1400) 2535,1420 2545,1430
  Bottom Layer w10: v1(1265,195) 1795,195 1870,270 v1(1870,325) 2045,325 2065,305 v1(2065,265) ; v1@1270.3,189.7 cw(c1283.11,176.89) 1283.11,195 cw(c1283.11,213.11) v1@1270.3,200.3 ; v1@1679.7,645.3 ccw(c1666.89,658.11) 1685,658.11 ccw(c1703.11,658.11) v1@1690.3,645.3 ; v1(1685,640) 1685,690 1720,725 1875,725 1900,750 1900,830 1915,845 v1(2005,845) ; v1@1864.7,319.7 cw(c1851.89,306.89) 1870,306.89 cw(c1888.11,306.89) 1875.3,319.7 cw(c1888.11,306.89) 1888.11,325 cw(c1888.11,343.11) v1@1875.3,330.3 ; C5.1@2000.91,790.39 ccw(c1978.19,813.11) 2010.31,813.11 ccw(c2042.44,813.11) C5.1@2019.72,790.39 ; C5.1@2010.31,780 2010.31,885.32 2040,915 U4.8@2110.59,915 ; 2010.31,814.06 ccw(c1974.06,814.06) 1999.7,839.7 ccw(c1986.89,826.89) 1986.89,845 ccw(c1986.89,863.11) 1999.7,850.3 ccw(c1974.06,875.94) 2010.31,875.94 ; v1@2059.7,270.3 ccw(c2046.89,283.11) 2065,283.11 ccw(c2083.11,283.11) v1@2070.3,270.3 ; U4.8@2085.29,909.7 ccw(c2072.48,896.89) 2072.48,915 ccw(c2072.48,933.11) U4.8@2085.29,920.3 ; R6.2@2185.91,655.39 ccw(c2151.12,690.18) 2200.32,690.18 ; R6.2@2192.98,648.32 ccw(c2175.26,666.04) 2200.32,666.04 ccw(c2215.37,666.04) R6.2@2204.72,655.39 ; R6.2@2195.32,645 2195.82,644.5 2299.5,644.5 2424.04,769.04 2424.04,941.45 ; R6.2@2200.32,658.99 cw(c2252.34,658.99) R7.2@2218.88,698.83 ; R6.2@2200.32,660 R7.2@2200.32,720 ; 2200.32,680.46 cw(c2234.31,680.46) R7.2@2212.44,706.48 ; R6.2@2204.72,634.61 cw(c2228.61,610.72) v1@2228.61,644.5 ; R6.2@2204.72,653.43 ccw(c2226.27,674.97) v1@2226.27,644.5 ; 2214.48,640.71 cw(c2220.2,619.36) v1@2231.25,638.5 ; 2215.62,647.35 ccw(c2219.73,662.67) v1@2230.09,650.67 ; 2215.69,644.5 ccw(c2215.69,664.31) v1@2229.7,650.3 ; 2218.1,644.5 cw(c2218.1,628.1) v1@2229.7,639.7 ; 2219.94,642.18 ccw(c2216.29,655.8) v1@2228.5,648.75 ; v1@2240.3,639.7 cw(c2251.9,628.1) 2251.9,644.5 ; v1@2240.3,650.3 ccw(c2254.31,664.31) 2254.31,644.5
  Bottom Layer w20: U4.8@2110.59,915 2150,915 2150,937.47 ; U4.8@2130.53,917.5 ccw(c2130.02,937.47) 2150,937.47 ; 2182.56,1090.27 cw(c2182.56,1068.23) R21.2@2198.14,1083.81 ; 2185.36,1090.27 ccw(c2185.36,1108.34) R21.2@2198.14,1095.56 ; R21.2@2205,1089.68 2204.42,1090.27 2166.07,1090.27 2147.47,1071.67 2147.47,940 ; SWD.4@2480.89,981.5 cw(c2462.3,963.7) 2480.5,945.5 ; SWD.4@2484.74,978.38 cw(c2473.4,960) 2495,960 ; 2494.95,959.95 ccw(c2477.07,977.84) SWD.4@2495.34,995.33 ; SWD.4@2495,995 2495,960 ; SWD.4@2505.26,978.38 ccw(c2516.6,960) 2495,960 ; 2147.47,940 2152.97,945.5 2480.5,945.5 ; 2147.47,940 2150,937.47 ; 2480.5,945.5 2495,960
  Bottom Layer w25: v1(1360,1125) 1360,1190 1385,1215 1985,1215 2078.54,1308.54 2078.54,1400 ; RELAY2.1@1443.54,1504.72 1570.28,1504.72 1675,1400 2078.54,1400 ; RELAY2.1@1455.58,1492.68 cw(c1484.65,1463.62) 1484.65,1504.72 cw(c1484.65,1545.83) RELAY2.1@1455.58,1516.76 ; RELAY1.1@2066.5,1492.68 cw(c2037.44,1463.62) 2078.54,1463.62 cw(c2119.65,1463.62) RELAY1.1@2090.58,1492.68 ; RELAY1.1@2078.54,1504.72 2078.54,1400 ; RELAY3.4@2752.84,1486.94 cw(c2723.77,1457.87) 2764.88,1457.87 cw(c2805.99,1457.87) RELAY3.4@2776.92,1486.94 ; RELAY3.4@2764.88,1498.98 2764.88,1400 ; v1(3040,220) 3040,270 3471,701 3471,1019 3384.72,1105.28 RELAY3.1@3166.46,1105.28 3166.46,1193.54 2960,1400 2764.88,1400 ; RELAY3.1@3154.42,1117.32 ccw(c3125.35,1146.38) 3166.46,1146.38 ccw(c3207.56,1146.38) 3178.5,1117.32 ccw(c3207.56,1146.38) 3207.56,1105.28 ccw(c3207.56,1064.17) RELAY3.1@3178.5,1093.24 ; 2078.54,1400 v1(2535,1400) 2764.88,1400
VCC4.0V: C3.2 C4.2 C24.1 C25.1 R3.2 R5.2 U3.4 U7.33 U7.34 UART2.1 | length 3125.9
  Top Layer w50: 611.16,488.84 cw(c638.11,461.89) 638.11,500 ; 611.16,521.16 ccw(c662.25,572.25) 662.25,500 ; v1@626.89,500 cw(c626.89,461.89) 653.84,488.84 ; 636.16,488.84 cw(c663.11,461.89) 663.11,500 ; 636.16,521.16 ccw(c687.25,572.25) 687.25,500 ; 656.75,525.72 cw(c620,539.11) 620,500 v1@875,500 ; 816.16,493.84 cw(c831.04,478.96) v1@831.04,500 ; v1@818.96,500 cw(c818.96,478.96) 833.84,493.84 ; 841.16,493.84 cw(c856.04,478.96) v1@856.04,500 ; v1@843.96,500 cw(c843.96,478.96) 858.84,493.84 ; v1@873.96,500 cw(c873.96,478.96) 888.84,493.84
  Bottom Layer w20: R3.2@445.32,275 475,275 ; R3.2@451.19,269.13 cw(c465.37,254.94) 465.37,275 cw(c465.37,295.06) R3.2@451.19,280.87 ; 674,324 675,325
  Bottom Layer w50: 320.31,85.31 320.94,84.69 ; 320.31,420.31 335.32,435.32 R5.2@385,435.32 ; 430,215 445.32,230.32 ; 628.84,471.16 ccw(c613.96,486.04) v1@635,486.04 ; 628.84,488.84 cw(c613.96,473.96) v1@635,473.96 ; 628.84,496.16 ccw(c613.96,511.04) 635,511.04 ; 628.84,513.84 cw(c613.96,498.96) 635,498.96 ; 628.84,521.16 ccw(c613.96,536.04) v1@635,536.04 ; 628.84,538.84 cw(c613.96,523.96) v1@635,523.96 ; 635,465 635,970 675,1010 ; 835,500 UART2.1@1350,500 ; 841.16,493.84 cw(c856.04,478.96) v1@856.04,500 ; v1@843.96,500 cw(c843.96,478.96) 858.84,493.84 ; 871.16,493.84 cw(c886.04,478.96) v1@886.04,500 ; v1@873.96,500 cw(c873.96,478.96) 888.84,493.84
  Bottom Layer w60: 320.31,85.31 320.31,215 ; 320.31,420.31 320.31,215 ; 320.94,84.69 C3.2@450,84.69 ; 430,215 320.31,215 ; R3.2@443.8,264.39 ccw(c448.63,301.37) 475,275 524,324 cw(c555.47,292.53) U3.4@557.63,336.98 ; 445.32,230.32 R3.2@445.32,275 ; R3.2@445.32,264.29 ccw(c445.32,310.1) 477.71,277.71 ; 522.86,322.86 cw(c557,288.72) U3.4@557,337 ; U3.4@585,324 674,324 ; 635,465 675,425 675,325
  Bottom Layer w80: 524,324 U3.4@585,324
  other v1: 620,480 645,480 825,485 850,485 880,485 620,505 825,510 850,510 880,510 620,530 645,530 905,1270 925,1270 905,1295 925,1295 905,1320 925,1320
VCC6.0V: D1.1 P_6V.1 R14.2 RELAY1.4 RELAY2.4 U3.1 U3.2 | length 6462.5
  Top Layer w50: v2(1380,30) 1380,110.72 1421.8,152.53 1432.11,152.53 1461.62,182.04 1461.62,190 R14.2@1529.68,190
  Top Layer w80: D1.1@2300,210 2410,210 P_6V.1@2470,150 ; D1.1@2302.91,210 cw(c2302.91,-17.09) P_6V.1@2463.49,143.49
  Bottom Layer w50: U3.2@585,186 U3.1@585,117 585,55 617,23 2443,23 2470,50 P_6V.1@2470,150 2470,260 2500,290 2995.65,290 3425.5,719.85 3425.5,999.02 3384.52,1040 3085,1040 2830.5,1294.5 2128.85,1294.5 1945.37,1111.02 RELAY2.4@1845.12,1111.02 ; P_6V.1@2452.88,132.88 cw(c2411.55,91.55) 2470,91.55 cw(c2528.45,91.55) P_6V.1@2487.12,132.88 ; P_6V.1@2452.88,167.12 ccw(c2411.55,208.45) 2470,208.45 ccw(c2528.45,208.45) P_6V.1@2487.12,167.12 ; RELAY1.4@2480.12,1111.02 2480.12,1294.38
pads on no net: IPX. U3. U5.2 U5.7 U5.15 U5.22 U5.23 U5.33 U5.34 U5.35 U5.36 U5.38 U5.39 U5.40 U5.41 U5.44 U5.45 U5.50 U5.55 U5.56 U5.57 U5.58 U5.59 U5.61 U5.62 U6.1 U6.2 U6.4 U6.5 U6.6 U6.7 U6.8 U6.9 U6.13 U6.14 U6.15 U6.16 U6.17 U6.18 U6.19 U7.2 U7.3 U7.4 U7.5 U7.6 U7.7 U7.8 U7.9 U7.11 U7.16 U7.17 U7.18 U7.23 U7.24 U7.25 U7.26 U7.32 U7.41 U7.42 U8. U8.3 U9.3 Y1. Y2.

## Polygon pours and split planes (outlines as drawn)
GND on Top Layer "Top Overlay-No Net" (solid, pour order 2): -1.65,1600 -1.65,-10 3541.65,-10 3541.65,1600
GND on Bottom Layer "Top Overlay-No Net" (solid, pour order 4): -11.63,1602.63 -11.63,-22.37 3531.67,-22.37 3531.67,1602.63

## Keep-outs
Keep-Out Layer:
  lines w10: 0,-15 3543.31,-15 3543.31,1610 0,1610 0,-15

## Other copper
Top Layer:
  rectangle net VCC4.0V: 750,1250 945,1335
  rectangle net VCC4.0V: 750,1120 830,1330
Bottom Layer:
  rectangle net VCC4.0V: 835,1090 1205,1180
  rectangle net VCC4.0V: 835,965 910,1180
  rectangle net VCC4.0V: 1140,1090 1215,1315
  rectangle net VCC4.0V: 890,1250 1095,1335
  rectangle net VCC4.0V: 595,460 675,1045
  rectangle net VCC4.0V: 610,965 910,1045

## Silkscreen, mask and mechanical layers (free items; w line width, h text height)
Top Overlay:
  text "2017/01/22" at 1550,1375 h60
  text "+" at 2355,330 h60

## Text inside footprints (layer, text, board x,y; h text height)
U2: Top Overlay "1" at 3022.06,79.03 h50 r90; Top Overlay "3" at 3025,270 h50 r90